# Allegro board ETDS_PCB_V1_4.brd
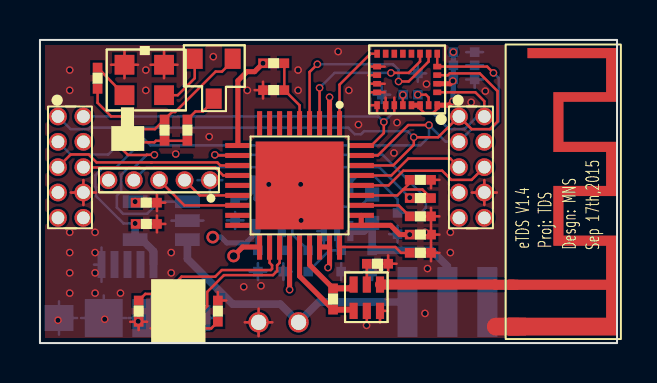
[diagram p0: board, top side]
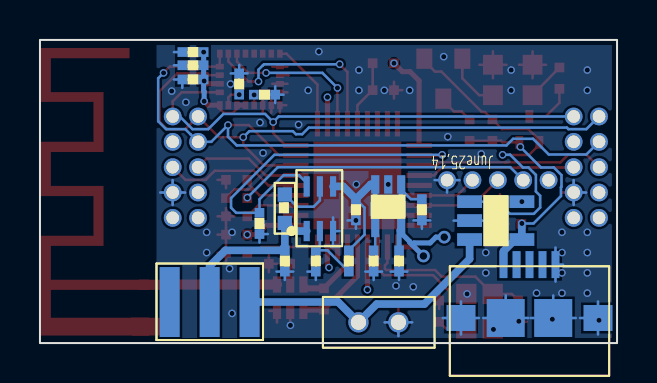
[diagram p1: board, bottom side, seen from below]

Outline 28.88 x 15.19 mm; copper layers: TOP, GND, VCC3V, BOTTOM. Coordinates in mm from the lower left corner of the outline.
Outline path: rectangle 0,0 28.88,15.19

## Design rules (mm)
net group DP_X: nets X+ X-
nets with their own width: min track width 0.305; nets N11233922 N11233938
nets with their own width: min track width 0.508; nets ANT_OUT

## Placement (name value [footprint] x y rotation side)
C1  10uF  [C0402]  20.26 15.27 0 bottom
C2  100nF  [C0402]  18.22 12.01 90 bottom
C3  1nF  [C0402]  16.68 13.13 0 bottom
C4  0.1uF  [C0402]  20.26 13.89 0 bottom
C5  0.1uF  [C0402]  20.26 14.61 0 bottom
C6  1nF  [C0402]  18.07 7.49 0 top
C7  1uF  [C0402]  18.07 5.66 0 top
C8  1uF  [C0402]  18.07 4.75 0 top
C9  22pF  [C0402]  15.93 3.29 0 top
C10  22pF  [C0402]  4.25 2.57 270 top
C11  22pF  [C0402]  9.59 0.63 90 top
C12  10nF  [C0402]  12.87 5.08 270 bottom
C13  10uF  [C0402]  17.31 5.08 270 bottom
C14  1uF  [C0402]  11.6 5.08 270 bottom
C15  1uF  [C0402]  10.45 7.65 270 bottom
C16  10uF  [C0402]  13.75 7.65 270 bottom
C17  1uF  [C0402]  4.36 5.28 0 top
H1  Header1X1  [BATTERY_CONNECT]  12.94 1.04 0 bottom
H8  -  [H4X2]  20.97 11.35 270 top
H9  H5X1_Debug  [H5X1_DEB]  5.96 8.15 180 top
H13  -  [H4X2]  0.9 11.35 270 top
L1  10nH  [L0402]  15 1.35 90 top
L2  4.7uH  [L0805]  17.13 8.03 270 bottom
M1  DMP22D6UT  [MOS_DMP]  3.57 9.63 0 top
M2  DMN5L06K  [MOS_DMN]  10.25 14.92 180 top
R1  100k  [R0402]  12.56 14.35 180 top
R2  200k  [R0402]  10.83 12.34 0 top
R3  2.7k  [R0402]  18.17 6.93 0 top
R4  56k  [R0402]  18.17 4.19 0 top
R5  1.2meg  [R0402]  18.22 6.86 270 bottom
R6  160k  [R0402]  15.41 4.98 270 bottom
R7  1.2meg  [R0402]  13.75 4.98 270 bottom
R8  1k  [R0402]  4.46 6.71 0 top
R9  10k  [R0402]  6.57 9.8 90 top
R10  3.9k  [R0402]  2.55 14.14 270 top
R11  8k  [R0402]  7.05 11.53 270 top
S1  CSS-1210B  [SWITCH]  23.05 3.99 270 bottom
U1  1  [CC2510]  12.99 7.9 270 top
U2  TPS71733  [TPS71730]  10.45 8.53 0 bottom
U3  -  [LTC4054]  8.12 7.54 270 bottom
U4  APBL3025  [LEDAP1]  3.34 11.66 0 top
UNK1  -  [LSM9DS1]  18.38 13.21 180 top
UNK2  Header1X1  [ANT_W]  24.63 6.81 0 top
UNK3  balunn  [BALUNN]  15.27 1.05 0 top
UNK4  Value  [TPS61220]  16.04 4.85 180 bottom
USB1  Header5X1  [TE_USB_2174507-2]  4.38 1.26 180 bottom
X1  26MHz  [CRYST_26M]  8.43 -0.05 90 top

## Library data of the parts
C1-C5 C7 C8 C10 C11 C17 = C
C6 C9 C12 C15 = C: room: 1
C13 C14 C16 = C: room: 2
H1 = Header1X1_0: room: 2
H8 H13 = H4X2_0
H9 = H5X1_Debug
L1 = INDUCTOR
L2 = INDUCTOR: room: 1
M1 = MOSFET P_0
M2 = DMN5L06K
R1 R2 R4 R8-R11 = R
R3 R5-R7 = R: room: 1
S1 = SW_0: room: 1
U1 = cc2510f32rspr_1
U2 = TPS71730_0: room: 1
U3 = LTC4054_0
U4 = BRPG1204_0
UNK1 = LSM9DS1
UNK2 = Header1X1_0: room: 1
UNK3 = balunn
UNK4 = TPS61220DCKR
USB1 = Header1X1_1: room: 2
X1 = CRYSTAL_2

## Footprints (pads in the part's own frame, mm; a bottom-side part is the same pattern mirrored in y, then rotated)
ANT_W
  rect 0.508x0.508 smd: 1(-0.94,-3.886)
  rect 0.889x0.889 smd: 2(-0.749,-5.982)
BALUNN
  rect 0.406x0.813 smd: 1(1.753,1.88) 2(1.092,1.88) 3(0.432,1.88) 4(0.432,0.559) 5(1.092,0.559) 6(1.753,0.559)
BATTERY_CONNECT
  round 1.016 hole 0.762: 1(0,0) 2(-2,0)
C0402
  rect 0.483x0.483 smd: 1(0.432,0.686) 2(1.499,0.686)
CC2510
  rect 1.27x0.254 smd: 1(-3.086,2) 2(-3.086,1.5) 3(-3.086,1) 4(-3.086,0.5) 5(-3.086,0) 6(-3.086,-0.5) 7(-3.086,-1) 8(-3.086,-1.5) 9(-3.086,-2) 19(3.086,-2) 20(3.086,-1.5) 21(3.086,-1) 22(3.086,-0.5) 23(3.086,0) 24(3.086,0.5) 25(3.086,1) 26(3.086,1.5) 27(3.086,2)
  rect 0.254x1.27 smd: 10(-2,-3.086) 11(-1.5,-3.086) 12(-1,-3.086) 13(-0.5,-3.086) 14(0,-3.086) 15(0.5,-3.086) 16(1,-3.086) 17(1.5,-3.086) 18(2,-3.086) 28(2,3.086) 29(1.5,3.086) 30(1,3.086) 31(0.5,3.086) 32(0,3.086) 33(-0.5,3.086) 34(-1,3.086) 35(-1.5,3.086) 36(-2,3.086)
  rect 4.4x4.4 smd: 37(0,0)
CRYST_26M
  rect 1.016x1.016 smd: 1(0.787,0.889) 2(2.515,2.21) 3(2.515,0.889) 4(0.787,2.21)
H4X2
  round 0.889 hole 0.635: 1(0,0) 2(0,1.27) 3(1.27,0) 4(1.27,1.27) 5(2.54,0) 6(2.54,1.27) 7(3.81,0) 8(3.81,1.27) 9(5.08,0) 10(5.08,1.27)
H5X1_DEB
  round 0.889 hole 0.635: 1(-2.55,-0.01) 2(-1.28,-0.01) 3(-0.01,-0.01) 4(1.26,-0.01) 5(2.53,-0.01)
L0402
  rect 0.483x0.483 smd: 1(0.33,0.33) 2(1.397,0.33)
L0805
  rect 0.711x0.711 smd: 1(0.584,0.508) 2(2.007,0.508)
LEDAP1
  rect 0.991x0.991 smd: 1(0.889,0.762) 2(0.889,2.286) 3(2.87,0.762) 4(2.87,2.286)
LSM9DS1
  rect 0.28x0.4 smd: 1(-1.505,1.29) 6(-1.505,-1.29) 7(-1.075,-1.29) 8(-0.645,-1.29) 9(-0.215,-1.29) 10(0.215,-1.29) 11(0.645,-1.29) 12(1.075,-1.29) 13(1.505,-1.29) 18(1.505,1.29) 19(1.075,1.29) 20(0.645,1.29) 21(0.215,1.29) 22(-0.215,1.29) 23(-0.645,1.29) 24(-1.075,1.29)
  rect 0.4x0.28 smd: 2(-1.505,0.645) 3(-1.505,0.215) 4(-1.505,-0.215) 5(-1.505,-0.645) 14(1.505,-0.645) 15(1.505,-0.215) 16(1.505,0.215) 17(1.505,0.645)
LTC4054
  rect 0.635x1.245 smd: 1(0.457,0.737) 2(1.407,0.737) 3(2.357,0.737) 4(2.357,3.353) 5(0.457,3.353)
MOS_DMN
  rect 0.8x1.016 smd: 1(0.605,0.676) 2(2.504,0.676) 3(1.554,2.676)
MOS_DMP
  rect 0.4x0.635 smd: 1(0.32,0.43) 2(1.32,0.43) 3(0.82,1.73)
R0402
  rect 0.483x0.483 smd: 1(0.33,0.33) 2(1.397,0.33)
SWITCH
  rect 3.505x1 smd: 1(1.93,4.661) 2(1.93,2.661) 3(1.93,0.661)
TE_USB_2174507-2
  rect 0.4x1.35 smd: 1(-1.3,2.675) 2(-0.648,2.675) 3(0,2.675) 4(0.65,2.675) 5(1.3,2.675)
  rect 1.9x1.9 smd: 6(1.189,0) 7(-1.189,0)
  rect 1.45x1.3 smd: 8(3.429,0) 9(-3.429,0)
TPS61220
  rect 0.305x1.016 smd: 1(0.508,0.762) 2(1.168,0.762) 3(1.829,0.762) 4(1.829,2.997) 5(1.168,2.997) 6(0.508,2.997)
TPS71730
  rect 0.406x0.914 smd: 1(0.349,0.584) 2(0.999,0.584) 3(1.649,0.584) 4(1.649,2.769) 5(0.349,2.769)

## Nets
GND: C1.2 C2.2 C3.1 C4.2 C5.2 C6.2 C7.2 C8.2 C9.2 C10.2 C11.2 C12.2 C13.2 C14.2 C15.2 C16.2 C17.2 H1.2(GND) H8.8 H9.1(GND) H13.8 R2.1 R4.2 R5.2 R6.2 R8.2 U1.37(GND EXPOSED) U2.2(GND) U3.2(GND) U4.2(-1) U4.4(-2) UNK1.14 UNK1.15 UNK1.16 UNK1.17 UNK1.18 UNK1.19 UNK1.20 UNK2.2 UNK3.5 UNK3.6 UNK4.3 USB1.5(GND) USB1.6(NC1) USB1.7(NC2) USB1.8(NC3) USB1.9(NC4) X1.3(GND#3) X1.4(GND#4)
VBAT: C13.1 L2.2 S1.2(CONT1) UNK4.1
VCC3V: C1.1 C4.1 C5.1 C8.1 C14.1 H8.7 H9.5(VCC) H13.7 R1.2 U1.2(DVDD#2) U1.10(DVDD#10) U1.19(AVDD#19) U1.22(AVDD#22) U1.25(AVDD#25) U1.26(AVDD#26) U1.28(GUARD) U1.29(AVDD_DREG) U2.5(OUT) UNK1.1 UNK1.3 UNK1.22 UNK1.23
ANT_OUT: UNK2.1 UNK3.1
BAT: H1.1(VCC) S1.1(POLE) U3.3(BAT)
DC: H9.3(DC) U1.16(P2_2)
DD: H9.2(DD) U1.15(P2_1)
DDEN: R5.1 U1.11(P0_5) UNK4.6
DEN_AG: U1.1(P1_2) UNK1.13
RESET_N: C6.1 R3.2 U1.31(RESET_N)
SPI_MISO: H8.3 H13.3 U1.35(P1_4) UNK1.5 UNK1.6
SPI_MOSI: H8.1 H13.1 U1.34(P1_5) UNK1.4
SPI_NCS_S1: H13.5 U1.12(P0_6)
SPI_NCS_S2: H13.6 U1.13(P0_7)
SPI_NCS_S3: H8.5 U1.33(P1_6)
SPI_NCS_S4: H8.6 U1.32(P1_7)
SPI_NCS_S5: U1.3(P1_1) UNK1.8
SPI_NCS_S6: U1.4(P1_0) UNK1.7
SPI_SCK: H8.2 H13.2 U1.36(P1_3) UNK1.2
V_5V: C17.1 M1.2(DRAIN) R9.1 R11.2 U3.4(VCC) USB1.1(5V)
X+: C11.1 U1.21(XOSC_Q1) X1.1
X-: C10.1 U1.20(XOSC_Q2) X1.2
N11233658: C3.2 UNK1.21
N11233772: H9.4(RST) R3.1
N11233906: C2.1 UNK1.24
N11233918: C9.1 UNK3.2
N11233922: L1.2 U1.24(RF_N) UNK3.3
N11233938: L1.1 U1.23(RF_P) UNK3.4
N11233970: R1.1 R2.2 U1.5(P0_0)
N11234106: C7.1 U1.30(DCOUPL)
N11234158: R4.1 U1.27(RBIAS)
N11234636: M2.3(D) R11.1
N11234650: M1.1(GATE) M2.1(G) R9.2 U3.1(\\C\H\R\G)
N11234694: M2.2(S) U4.3(GREEN)
N11234698: R10.1 U4.1(RED)
N11234710: M1.3(SOURCE) R10.2
N11234806: R8.1 U3.5(PROG)
N11235194: C15.1 C16.1 R7.1 U2.1(IN) U2.3(EN) UNK4.4
N11235318: C12.1 U2.4(NR/FB)
N11235544: R6.1 R7.2 UNK4.2
N11235586: L2.1 UNK4.5

Pads without a net: H8 4 9 10; H13 4 9 10; S1 3; U1 6 7 8 9 14 17 18; UNK1 9 10 11 12; USB1 2 3 4

## Via types
v1: diameter 0.381, hole 0.254, TOP to BOTTOM, 70 vias
v2: diameter 0.635, hole 0.381, TOP to BOTTOM, 2 vias

## Routing (per net, layer and track width the routed paths; a pad name or vN(x,y) marks a point on that pad's centre or on a via; arc(x,y) is an arc through that point)
GND: length 91.1
  TOP w0.127: 17.3,11.54 UNK1.19 17.3,12.3 ; C11.2 8.9,2.55 ; C11.2 9.32,2.13 ; C11.2 8.9,1.71 ; C7.2 19.99,6.35 ; C7.2 19.57,5.93 ; C7.2 19.57,6.77 ; C7.2 19.15,6.35 ; 22.24,6.92 H8.8 ; H8.8 22.24,8.17 ; H8.8 21.61,7.54 ; H8.8 22.86,7.54 ; R4.2 19.99,4.52 ; R4.2 19.57,4.1 ; R4.2 19.15,4.52 ; R4.2 19.57,4.94 ; C17.2 6.27,5.97 ; C17.2 5.85,6.39 ; C17.2 5.85,5.55 ; C17.2 5.44,5.97 ; C10.2 5.36,1.07 ; C10.2 4.94,0.65 ; C10.2 4.94,1.49 ; C10.2 4.52,1.07 ; 17,3.98 C9.2 ; C9.2 17.84,3.98 ; C9.2 17.42,3.56 ; C9.2 17.42,4.39 ; 17.02,1.03 UNK3.6 17.4,1.61 ; 6.22,1.42 X1.4 5.54,0.74 ; R8.2 5.85,7.46 ; R8.2 6.27,7.04 ; R8.2 5.85,6.62 ; R8.2 5.44,7.04 ; U4.4 6.88,13.94 ; U4.4 5.54,13.94 ; U4.4 6.21,14.62 ; U4.4 6.21,13.27 ; U4.2 4.9,13.94 ; U4.2 4.23,14.62 ; U4.2 4.23,13.27 ; U4.2 3.56,13.94 ; 10.74,12.67 R2.1 ; R2.1 11.16,13.09 ; R2.1 11.16,12.25 ; R2.1 11.58,12.67 ; 1.55,7.54 H13.8 ; H13.8 2.17,8.17 ; H13.8 2.17,6.92 ; H13.8 2.79,7.54 ; UNK3.5 16.36,0.95 16.34,0.94 ; 10.94,0.36 H1.2 ; H1.2 11.63,1.04 ; H1.2 10.94,1.73 ; H1.2 10.25,1.04 ; C8.2 19.57,5.86 ; C8.2 19.57,5.02 ; C8.2 19.15,5.44 ; C8.2 19.99,5.44 ; 16.49,13.85 UNK1.14 17.25,13.85 ; 16.87,11.54 UNK1.18 16.55,11.92 ; 17.73,11.54 UNK1.20 17.73,12.3 ; 16.49,12.56 UNK1.17 17.25,12.56 ; 17.25,12.99 UNK1.16 16.49,12.99 ; UNK1.15 16.46,13.42 16.45,13.41 ; 19.57,7.76 C6.2 19.99,8.18
  TOP w0.889: UNK2.2 22.81,0.83
  GND w0.127: 10.25,1.04 H1.2 ; H1.2 10.94,1.73 ; H1.2 11.63,1.04 ; H1.2 10.94,0.36 ; 1.55,7.54 H13.8 ; H13.8 2.79,7.54 ; H13.8 2.17,6.92 ; H13.8 2.17,8.17 ; 22.24,6.92 H8.8 ; H8.8 21.61,7.54 ; H8.8 22.86,7.54 ; H8.8 22.24,8.17 ; H9.1 8.51,8.79 ; H9.1 7.88,8.16 ; H9.1 9.13,8.16 ; H9.1 8.51,7.54
  BOTTOM w0.127: C13.2 16.62,4 ; C13.2 17.04,3.58 ; C13.2 16.2,3.58 ; C13.2 16.62,3.16 ; v1(13.07,6.15) 13.07,6.57 ; v1(13.07,6.15) 13.49,6.15 ; v1(13.07,6.15) 13.07,5.73 ; 0.95,0.43 USB1.8 ; USB1.8 0.95,2.09 ; USB1.8 1.86,1.26 ; 21.61,7.54 H8.8 ; H8.8 22.24,6.92 ; H8.8 22.86,7.54 ; H8.8 22.24,8.17 ; 15.07,3.16 R6.2 ; R6.2 15.49,3.58 ; R6.2 15.07,4 ; 21.34,14.58 C1.2 22.17,14.58 ; 18.91,13.09 C2.2 ; C2.2 18.49,13.51 ; C2.2 18.91,13.93 ; C2.2 19.33,13.51 ; 21.34,13.92 C5.2 22.17,13.92 ; 10.94,0.36 H1.2 ; H1.2 11.63,1.04 ; H1.2 10.25,1.04 ; 2.06,1.26 USB1.6 ; USB1.6 4.32,1.26 ; USB1.6 3.19,2.39 ; C3.1 17.53,12.45 ; C3.1 17.11,12.87 ; C3.1 16.69,12.45 ; C3.1 17.11,12.03 ; C15.2 9.77,6.57 ; C15.2 9.35,6.15 ; C15.2 9.77,5.73 ; C15.2 10.19,6.15 ; 21.34,13.21 C4.2 ; C4.2 21.76,12.79 ; C4.2 22.17,13.21 ; 10.49,3.58 C14.2 ; C14.2 10.91,3.16 ; C14.2 10.91,4 ; C14.2 11.33,3.58 ; USB1.7 6.7,1.26 ; USB1.7 4.44,1.26 ; USB1.7 5.57,2.39 ; 17.47,5.46 R5.2 ; R5.2 17.89,5.88 ; R5.2 17.89,5.04 ; H9.1 9.13,8.16 ; H9.1 8.51,7.54 ; H9.1 7.88,8.16 ; 13.88,5.61 UNK4.3 ; UNK4.3 14.21,4.93 ; UNK4.3 14.21,6.3 ; USB1.5 3.08,4.79 ; USB1.5 3.08,3.08 ; USB1.5 2.7,3.93 ; 6.91,1.26 USB1.9 ; USB1.9 8.71,1.26 ; USB1.9 7.81,2.09 ; USB1.9 7.81,0.43 ; 2.17,6.92 H13.8 ; H13.8 2.17,8.17 ; H13.8 1.55,7.54 ; 12.18,3.16 C12.2 ; C12.2 11.76,3.58 ; C12.2 12.18,4 ; C12.2 12.6,3.58 ; 8.18,6.14 U3.2 6.58,6.14
  vias: v1(0.9,1.14) v1(1.49,13.68) v1(1.49,12.66) v1(1.49,5.55) v1(1.49,4.53) v1(1.49,3.52) v1(1.49,2.5) v1(2.76,5.55) v1(2.76,4.53) v1(2.76,3.52) v1(2.76,2.5) v1(3.24,1.19) v1(4.03,2.5) v1(4.91,1.09) v1(5.3,13.68) v1(5.3,12.66) v1(6.18,0.69) v1(6.57,4.53) v1(6.57,3.52) v1(6.79,9.47) v1(7.51,2.46) v1(8.47,10.34) v1(8.67,14.35) v1(10.2,2.82) v1(10.38,12.66) v1(11.06,2.87) v1(11.45,7.95) v1(11.65,12.66) v1(12.92,13.68) v1(12.92,12.66) v1(13.05,7.95) v1(14.92,14.61) v1(15.46,12.66) v1(15.94,10.95) v1(16.34,0.89) v1(17.72,9.52) v1(17.87,11.05) v1(19.27,5.55) v1(19.27,1.49) v1(19.34,12.98) v1(19.39,3.73) v1(20.54,5.55) v1(20.54,4.53) v1(21.58,12.06) v1(22.29,12.62)
VBAT: length 8.5
  BOTTOM w0.381: S1.2 20.39,3.86 19.6,4.65 C13.1 L2.2 16.22,5.61 UNK4.1
VCC3V: length 32.1
  TOP w0.127: UNK1.23 19.02,11.74 19.23,11.53 19.67,11.53 19.88,11.74 UNK1.1
  TOP w0.254: v1(18.5,5.44) 18.01,5.44 17.54,5.9 U1.28 U1.29 ; UNK1.22 UNK1.23 ; U1.25 U1.26 14.49,3.86 v1(14.41,3.78) ; UNK1.1 20.47,11.92 v1(20.66,12.12) ; v1(20.66,13.13) 20.52,12.99 UNK1.3 ; v2(9.69,4.36) 10.14,4.81 U1.19 ; U1.10 9.91,13.14 10.36,13.6 10.74,13.6 v1(11.16,14.02) ; U1.22 v1(12.49,2.68) ; U1.2 v1(14.49,12.32)
  VCC3V w0.127: H13.7 1.52,7.54 ; H13.7 0.9,6.92 ; H13.7 0.9,8.17 ; H9.5 3.43,8.79 ; H9.5 3.43,7.54 ; H9.5 4.05,8.16 ; H9.5 2.8,8.16 ; H8.7 20.97,8.17 ; H8.7 20.97,6.92 ; H8.7 20.34,7.54 ; H8.7 21.59,7.54
  BOTTOM w0.254: C14.1 10.91,5.66 U2.5 10.8,5.51 10.37,5.08 10.37,5.05 10.25,4.92 ; v1(20.66,12.12) 20.66,12.6 20.69,12.62 C4.1 C5.1 v1(20.69,14.58) ; 10.25,4.92 10.16,5.02 9.35,5.02 9.06,5.31 v2(8.65,5.31) ; 10.25,4.92 v2(9.69,4.36)
ANT_OUT: length 6.7
  TOP w0.508: UNK2.1 22.8,2.92 22.78,2.93 UNK3.1
BAT: length 13.7
  BOTTOM w0.381: U3.3 7.38,4.22 9.64,1.96 12.03,1.96 H1.1 13.96,2.06 S1.1
DC: length 4.5
  TOP w0.127: H9.3 7.23,6.9 U1.16
DD: length 3
  TOP w0.127: H9.2 8,7.4 U1.15
DDEN: length 18.5
  TOP w0.127: v1(8.75,9.43) 8.79,9.4 U1.11
  BOTTOM w0.127: UNK4.6 15.53,8.03 15.91,8.41 16.69,8.41 17.89,7.2 R5.1 19.06,6.53 19.32,6.78 19.32,7.26 17.15,9.43 v1(8.75,9.43)
DEN_AG: length 4.5
  TOP w0.127: UNK1.13 16.54,14.5 14.99,12.95 U1.1
RESET_N: length 4.4
  TOP w0.127: 18.18,7.7 17.89,7.4 U1.31 ; 18.18,7.7 19.14,7.7 R3.2 ; 18.18,7.7 18.5,8.02 C6.1
SPI_MISO: length 34.5
  TOP w0.127: U1.35 16.9,9.4 18.43,10.92 v1(19.47,10.92) ; UNK1.6 UNK1.5 22.38,13.85 v1(22.69,13.54)
  BOTTOM w0.127: H13.3 1.54,9.45 3.42,9.45 4.2,10.24 5.2,10.24 5.53,9.91 19.04,9.91 19.47,10.34 v1(19.47,10.92) 20.31,10.08 H8.3 21.35,10.46 21.35,10.46 21.61,10.72 22.57,10.72 22.96,11.12 22.96,13.27 v1(22.69,13.54)
SPI_MOSI: length 31.9
  TOP w0.127: U1.34 17.68,8.9 18.71,9.93 v1(18.71,10.31) 19.93,10.31 H8.1 21.6,10.72 22.52,10.72 22.9,11.1 22.9,12.62 22.01,13.51 20.5,13.51 20.41,13.42 UNK1.4
  BOTTOM w0.127: v1(18.71,10.31) 18.4,10.62 16.22,10.62 16.07,10.46 15.76,10.46 15.42,10.8 2.51,10.8 2.43,10.72 1.54,10.72 H13.1
SPI_NCS_S1: length 9.5
  TOP w0.127: H13.5 1.54,9.45 2.43,9.45 2.83,9.05 5.56,9.05 5.57,9.04 5.59,9.04 5.6,9.05 8.87,9.05 9.03,8.9 U1.12
SPI_NCS_S2: length 7.9
  TOP w0.127: H13.6 2.19,8.8 4.96,8.8 4.97,8.79 5.69,8.79 5.7,8.8 8.77,8.8 9.17,8.4 U1.13
SPI_NCS_S3: length 5.4
  TOP w0.127: H8.5 20.54,9.25 18.43,9.25 17.59,8.4 U1.33
SPI_NCS_S4: length 6.9
  TOP w0.127: U1.32 17.44,7.9 18.18,8.64 20.13,8.64 20.59,8.18 21.6,8.18 H8.6
SPI_NCS_S5: length 7.8
  TOP w0.127: UNK1.8 19.02,14.11 18.45,13.54 v1(17.56,13.54) ; U1.3 v1(13.99,12.79)
  BOTTOM w0.127: v1(17.56,13.54) 14.74,13.54 v1(13.99,12.79)
SPI_NCS_S6: length 10.2
  TOP w0.127: v1(17.95,13.11) 18.45,13.11 19.45,14.11 UNK1.7 ; U1.4 13.49,13.58 v1(13.88,13.97)
  BOTTOM w0.127: v1(17.95,13.11) 17.95,13.7 17.72,13.92 17.72,13.92 17.67,13.97 v1(13.88,13.97)
SPI_SCK: length 26.2
  TOP w0.127: H8.2 22.24,12.12 21.79,12.56 UNK1.2 ; U1.36 16.59,9.9 17.21,10.52 v1(17.21,11.07)
  BOTTOM w0.127: H8.2 21.88,11.35 21.25,10.72 20.46,10.72 19.7,11.48 17.61,11.48 v1(17.21,11.07) 16.93,11.35 H13.2
V_5V: length 11.4
  TOP w0.127: M1.2 5.73,10.06 5.8,10.13 R9.1 R11.2
  BOTTOM w0.127: v1(4.76,5.99) 4.18,5.99 2.81,7.37 2.81,7.81 2.78,7.83 2.78,8.42 3.16,8.8 3.81,8.8 v1(4.84,9.83)
  BOTTOM w0.381: v1(4.76,5.99) U3.4 5.1,5.19 5.68,4.6 USB1.1
X+: length 8.9
  TOP w0.127: U1.21 11.99,4.02 11.87,3.9 11.87,3.61 11.66,3.4 9.21,3.4 8.37,2.57 8.37,1.85 7.54,1.03 X1.1 8.57,0.74 C11.1
X-: length 8.5
  TOP w0.127: U1.20 11.49,4.02 11.62,3.9 11.62,3.72 11.55,3.66 9.1,3.66 8.77,3.33 7.09,3.33 X1.2 5.27,2.46 C10.1
N11233658: length 0.5
  TOP w0.127: UNK1.21 v1(18.16,12.43)
N11233772: length 14.7
  BOTTOM w0.127: v1(18.5,7.29) 16.98,8.81 5.35,8.81 H9.4
N11233906: length 1
  TOP w0.127: UNK1.24 19.45,12.31 19.31,12.45 v1(18.91,12.45)
N11233918: length 1
  TOP w0.127: C9.1 UNK3.2
N11233922: length 3.7
  TOP w0.254: L1.2 13.49,3.92 U1.24
  TOP w0.305: UNK3.3 15.51,2.74 L1.2
N11233938: length 4.9
  TOP w0.254: U1.23 12.99,3.35 L1.1
  TOP w0.305: UNK3.4 15.63,1.68 L1.1
N11233970: length 3.4
  TOP w0.127: U1.5 12.99,11.91 R2.2 R1.1
N11234106: length 2.7
  TOP w0.127: U1.30 17.95,6.9 C7.1
N11234158: length 3.6
  TOP w0.127: U1.27 17.78,4.81 18.07,4.52 R4.1
N11234636: length 1.8
  TOP w0.127: M2.3 8.69,12.14 8.16,11.6 7.78,11.6 R11.1
N11234650: length 17.5
  TOP w0.127: v1(5.73,9.43) 5.35,9.43 5.34,9.42 4.4,9.42 3.89,9.94 M1.1 3.89,10.17 4.43,10.72 5.75,10.72 R9.2 6.61,11.58 6.76,11.58 8.79,13.6 9.11,13.6 9.64,14.14 M2.1
  BOTTOM w0.127: v1(5.73,9.43) 5.35,9.43 4.71,8.8 4.43,8.8 4.06,8.43 4.06,7.59 3.85,7.38 3.85,6.79 4.16,6.48 5.36,6.48 5.97,7.09 U3.1
N11234694: length 2.9
  TOP w0.127: U4.3 6.9,12.42 7.74,13.27 M2.2
N11234698: length 1.9
  TOP w0.127: R10.1 U4.1
N11234710: length 2.5
  TOP w0.127: M1.3 3.57,11.36 2.88,12.04 R10.2
N11234806:
  vias: v1(4.76,7.09)
N11235194: length 9.9
  BOTTOM w0.127: 10.8,7.7 10.32,7.21 C15.1 ; R7.1 12.64,5.44 12.64,6.78 C16.1
  BOTTOM w0.254: U2.1 10.8,7.24 11,7.04 11.9,7.04 12.1,7.24 U2.3
  BOTTOM w0.381: U2.3 12.33,7.95 C16.1 13.7,7.85 UNK4.4
N11235318: length 1.2
  BOTTOM w0.127: C12.1 12.1,4.73 U2.4
N11235544: length 3.1
  BOTTOM w0.127: UNK4.2 14.87,4.85 R6.1 14.49,4.65 R7.2
N11235586: length 2.8
  BOTTOM w0.127: L2.1 16.01,6.83 15.19,6.83 14.87,7.15 UNK4.5

## Copper pours and planes (outline as drawn; the poured copper is in the pictures)
GND on TOP: 0.25,0.25 0.25,14.93 23.05,14.93 23.38,14.94 23.38,0.25 ; 8 cut-outs
GND on BOTTOM: 0.25,0.25 0.25,14.93 23.05,14.93 23.05,0.25 ; 4 cut-outs
GND on GND: 0.25,0.25 0.25,14.93 23.05,14.93 23.05,0.25
VCC3V on VCC3V: 0.25,0.25 0.25,14.93 23.05,14.93 23.05,0.25
ANT_OUT on TOP (solid shape): 28.84,12.09 26.2,12.09 26.2,10.08 28.84,10.08 28.84,7.37 26.2,7.37 26.2,5.38 28.84,5.38 28.84,0.38 23.43,0.38 23.43,1.27 28.33,1.27 28.33,2.67 23.43,2.67 23.43,3.18 28.33,3.18 28.33,4.88 25.69,4.88 25.69,7.87 28.33,7.87 28.33,9.58 25.69,9.58 25.69,12.57 28.33,12.57 28.33,14.27 24.4,14.27 24.4,14.78 28.84,14.78

## Text on the board
Ref Des/Silkscreen Bottom: June25,14
Ref Des/Silkscreen Top: eTDS V1.4 | Proj: TDS | Desgn: MNS | Sep 17th,2015
